# Altium PCB Sahasrara_CaSense_PCB.PcbDoc
Units mil, origin at the board's own origin, x right, y up, seen from the top; angles counter-clockwise.
Board outline 1810 x 2780 mil, 2 copper layers (Top Layer, Bottom Layer); 37 components, 47 nets, 135 pads, 169 vias.
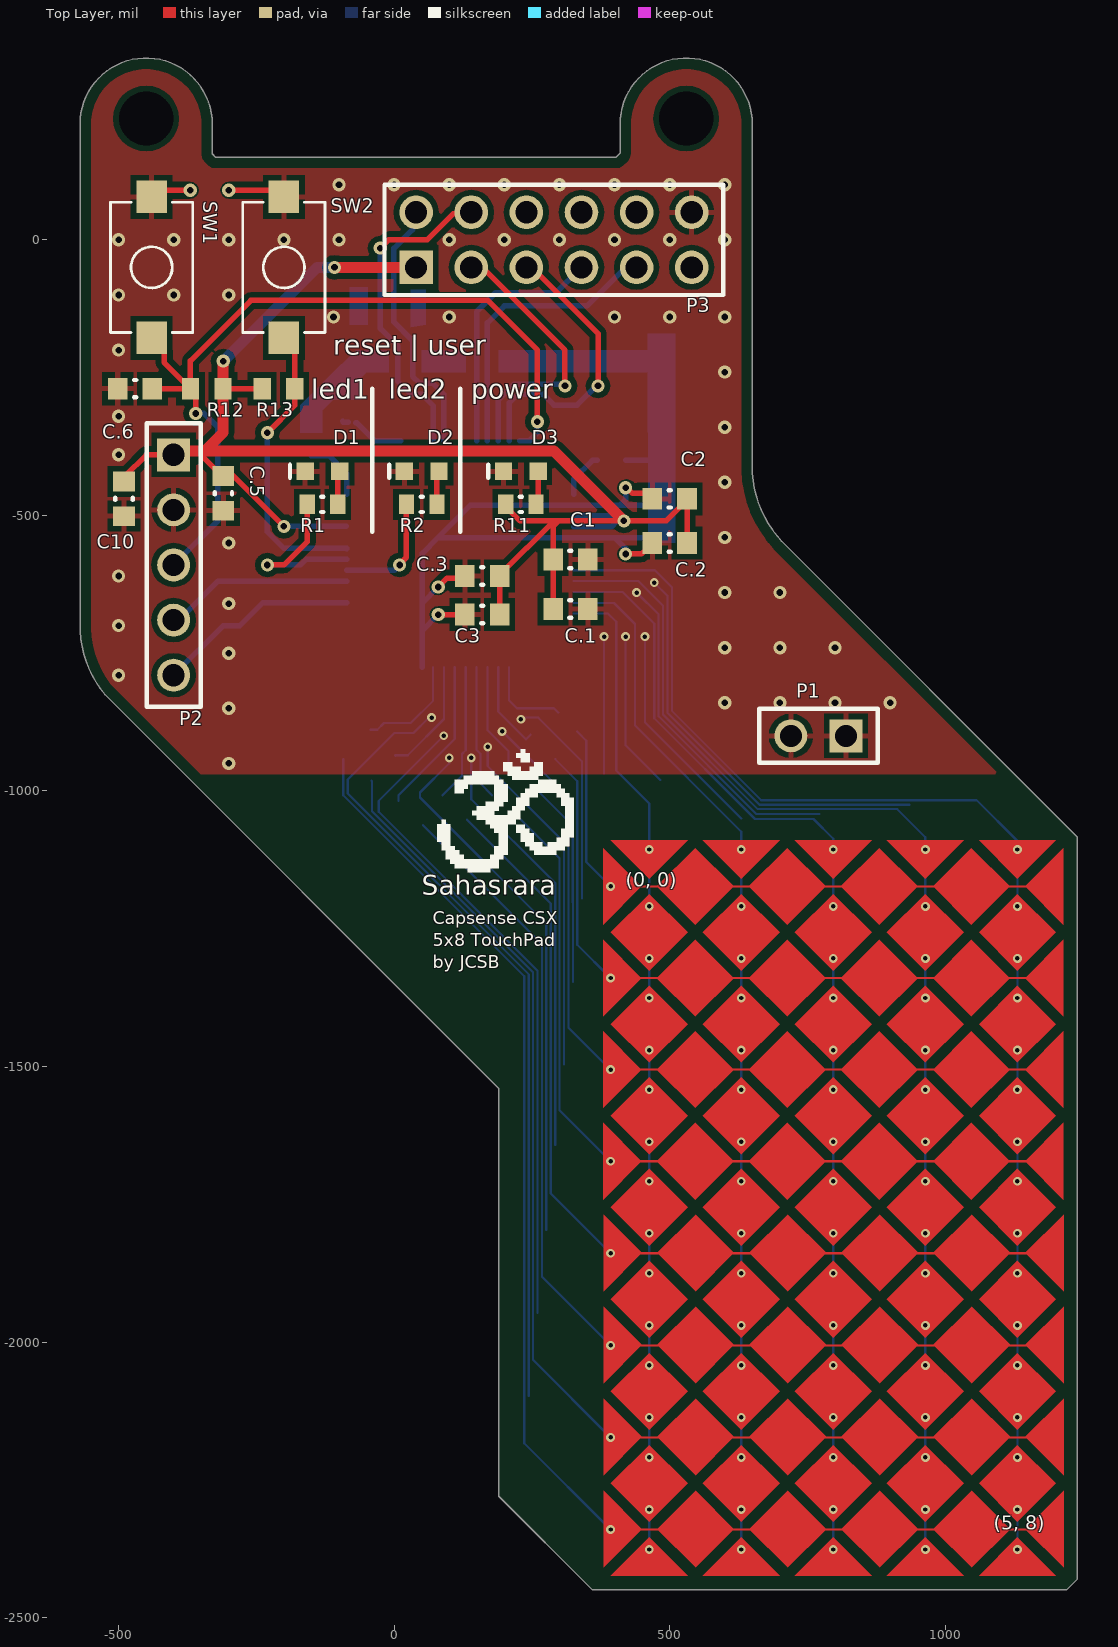
[diagram p0: Top Layer view]
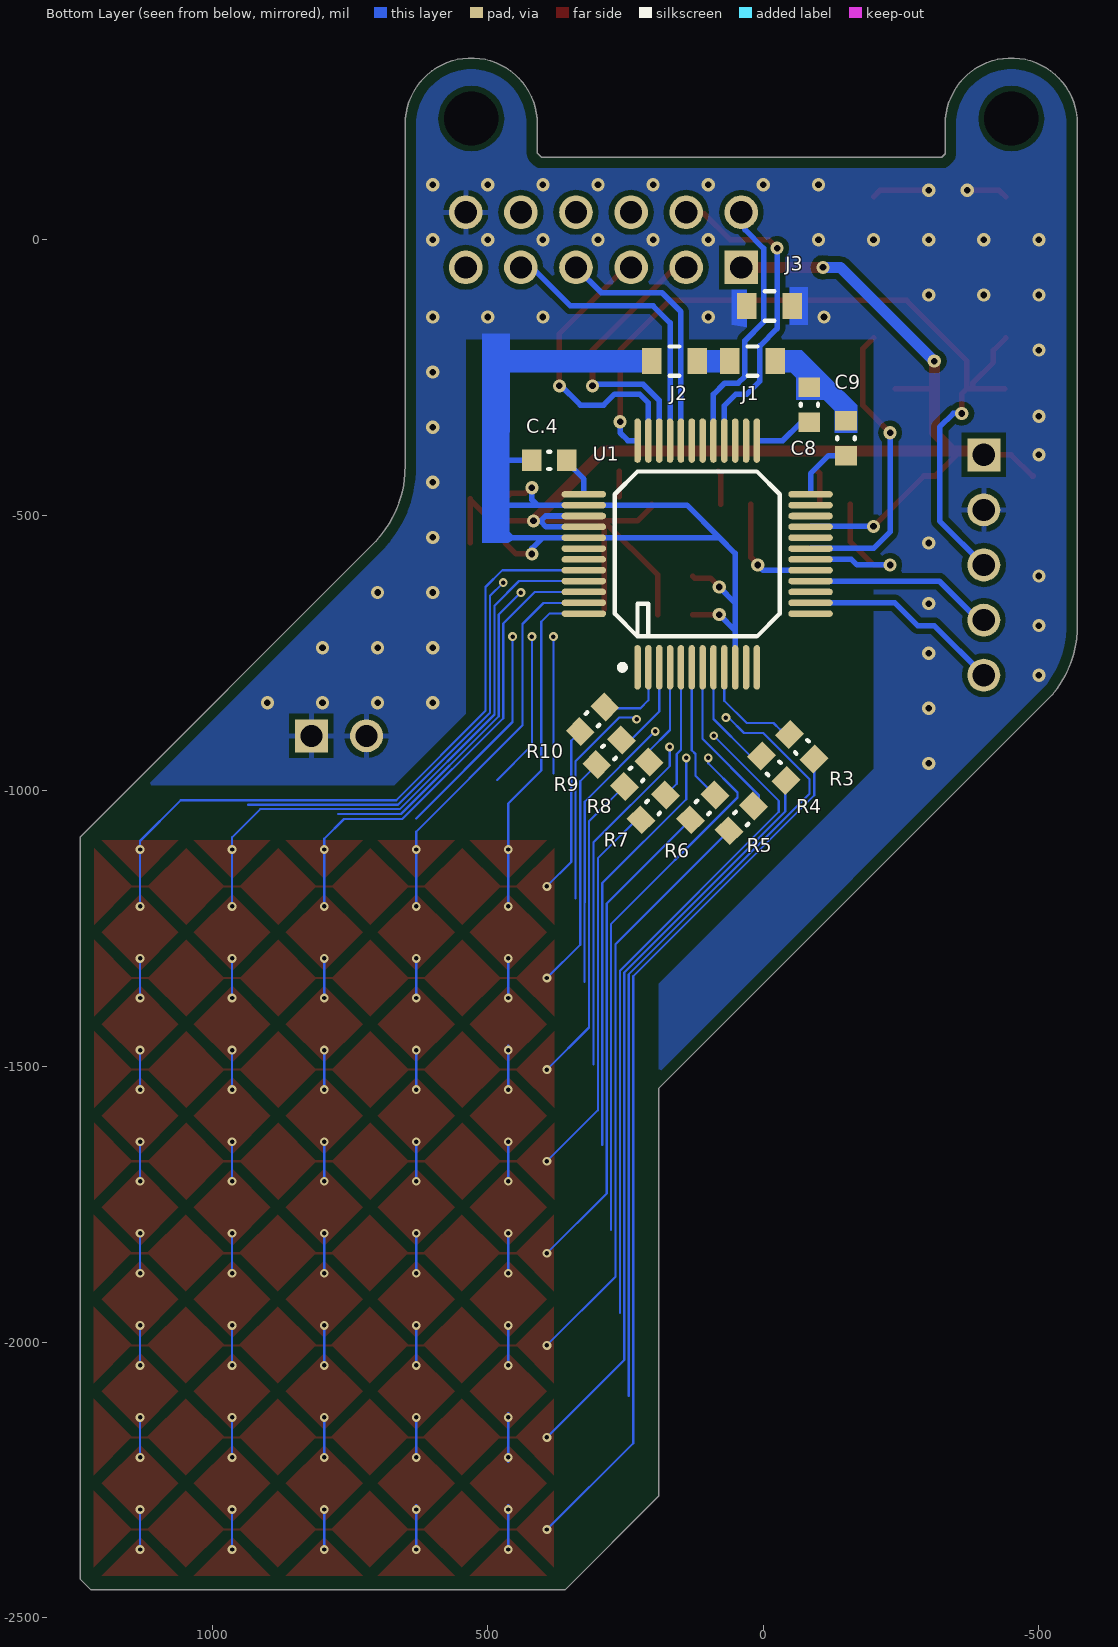
[diagram p1: Bottom Layer view, seen from below]

## Layer stack, top to bottom
Top Solder: solder mask 0.4, Solder Resist, Dk 3.5
Top Layer: signal copper 1.4
Dielectric 1: dielectric 12.6, FR-4, Dk 4.8
Bottom Layer: signal copper 1.4
Bottom Solder: solder mask 0.4, Solder Resist, Dk 3.5

## Board outline
190,-1540 -524.82,-825.18 -524.73,-825.08 cw(c-372.73,-699.32) -570,-696.61 -570,210 cw(c-450,210) -330,210 -330,156.09 -323.91,150 402.71,150 410,157.29 410,210 cw(c530,210) 650,210 650,-411.79 650,-409.09 ccw(c847.27,-411.79) 695.27,-537.56 702.78,-546.63 1240,-1083.86 1240,-2430 1220,-2450 360,-2450 190,-2280

## Design rules (kind name [scope] priority, off if disabled: settings)
BoardOutlineClearance [All] p1: gap=10 ignorepadtopadclearanceinfootprint=FALSE except(0: Arc-SplitContinuation Track-SplitContinuation SMDPad-SplitContinuation THPad-SplitContinuation Via-SplitContinuation Fill-SplitContinuation Poly-SplitContinuation Region-SplitContinuation Text-SplitContinuation; 20: Poly-OutlineEdge Poly-CavityEdge Poly-CutoutEdge Poly-SplitBarrior)
Clearance [All] p1: gap=10 ignorepadtopadclearanceinfootprint=FALSE except(0: Arc-Hole Track-Hole SMDPad-Hole Fill-Hole Poly-Hole Region-Hole Text-Hole; 4: Arc-Arc Arc-Track Track-Track; 5: Arc-SMDPad Arc-THPad Track-SMDPad Track-THPad SMDPad-SMDPad; 7: Arc-Via Track-Via SMDPad-Via THPad-Via Via-Via; 8: THPad-Hole Via-Hole)
HoleSize [All] p1: absolutevalues=TRUE maxlimit=100 minlimit=6 maxpercent=80.000 minpercent=20.000
MinimumAnnularRing [All] p1: minimumring=4
MinimumSolderMaskSliver [All] p1: minsoldermaskwidth=4.5
PolygonConnect PolygonConnect_1 [All] p1: thpad.connectstyle=Relief thpad.reliefconductorwidth=10 thpad.reliefentries=4 thpad.polygonreliefangle="90 Angle" thpad.airgapwidth=10 smdpad.connectstyle=Relief smdpad.reliefconductorwidth=10 smdpad.reliefentries=4 smdpad.polygonreliefangle="90 Angle" smdpad.airgapwidth=10 via.connectstyle=Direct via.reliefconductorwidth=10 via.reliefentries=4 via.polygonreliefangle="90 Angle" via.airgapwidth=10
RoomDefinition CY8C4125AZI-S433 [InComponentClass('CY8C4125AZI-S433')] p1: confinementstyle=ConfineOut formatcopy=TRUE lockcomponents=FALSE outline 5027.23,-1913.27 7868.27,-1913.27 7868.27,-541.5 5027.23,-541.5
RoomDefinition CSX_Capsense [InComponentClass('CSX_Capsense')] p2: confinementstyle=ConfineOut formatcopy=TRUE lockcomponents=FALSE outline 5032.28,-2198.43 6748.82,-2198.43 6748.82,-1962.2 5032.28,-1962.2
RoomDefinition Comm [InComponentClass('Comm')] p3: confinementstyle=ConfineOut formatcopy=TRUE lockcomponents=FALSE outline 5023.29,-2995.95 6098.09,-2995.95 6098.09,-2247.92 5023.29,-2247.92
RoutingVias [All] p1: holewidth=28 width=50 viastyle="Through Hole" minholewidth=6 minwidth=14 maxholewidth=28 maxwidth=50
SilkToSilkClearance [All] p1: silktosilkclearance=4
SilkToSolderMaskClearance [IsPad] p1: minsilkscreentomaskgap=7 clearancetoexposedcopper=TRUE
SolderMaskExpansion [All] p1: expansion=4 istentingtop=FALSE
Width [All] p1: maxlimit=30 minlimit=4 preferedwidth=10 minimp=50.000000 maximp=50.000000 favimp=50.000000
26 further rules are at their usual default settings.

## Classes and differential pairs
component class CY8C4125AZI-S433: C1 C2 C3 C.1 C.2 C.3 C.4 U1
component class CSX_Capsense: C8 C9 J1 J2 P1 R3 R4 R5 R6 R7 R8 R9 R10
component class Comm: C10 C.5 C.6 D1 D2 D3 J3 P2 P3 R1 R2 R11 R12 R13 SW1 SW2

## Components (designator, comment, footprint, x,y, rotation, side; value= is the part's Value field where it differs from the comment)
C1 "1uF" CAPC0603(1608)100_N 320,-580 r180 top
C2 "1uF" CAPC0603(1608)100_N 500,-470 r180 top
C3 "1uF" CAPC0603(1608)100_N 160,-680 r180 top
C8 "470pF" CAPC0603(1608)100_N -83.5,-299.25 r90 bottom
C9 "470pF" CAPC0603(1608)100_N -150,-360 r90 bottom
C10 "1uF" CAPC0603(1608)100_N -490,-470 r90 top
C.1 "0.1uF" CAPC0603(1608)100_N 320,-670 r180 top value=1uF
C.2 "0.1uF" CAPC0603(1608)100_N 500,-550 r180 top value=1uF
C.3 "0.1uF" CAPC0603(1608)100_N 160,-610 r180 top value=1uF
C.4 "0.1uF" CAPC0603(1608)100_N 388.5,-400 r0 bottom value=1uF
C.5 "0.1uF" CAPC0603(1608)100_N -310,-460 r90 top value=1uF
C.6 "0.1uF" CAPC0603(1608)100_N -470,-270 r0 top value=1uF
D1 "150060BS75000" 0603_A -130,-420 r0 top
D2 "150060BS75000" 0603_A 50,-420 r0 top
D3 "150060BS75000" 0603_A 230,-420 r0 top
J1 "0 ohm" FP-RT0805-MFG 20,-220 r0 bottom value=196Ω
J2 "0 ohm" FP-RT0805-MFG 161.34,-220 r0 bottom value=196Ω
J3 "0 ohm" FP-RT0805-MFG -11.34,-120 r0 bottom value=196Ω
P1 "MTLW-102-05-T-S-172" SMTC-MTLW-102-05-X-S-172 820,-900 r180 top
P2 "MTLW-105-05-L-S-190" SMTC-MTLW-105-05-X-S-190 -400,-390 r270 top
P3 "TSW-106-07-G-D" SMTC-TSW-106-07-X-D 40,-50 r0 top
R1 "330" RESC0603(1608)_L -130,-480 r0 top value="330.00 Ohm"
R2 "330" RESC0603(1608)_L 50,-480 r0 top value="330.00 Ohm"
R3 "2K" RESC0603(1608)_N -70,-920 r225 bottom value="2000.00 Ohm"
R4 "2K" RESC0603(1608)_N -19,-959 r225 bottom value="2000.00 Ohm"
R5 "2K" RESC0603(1608)_N 40,-1050 r315 bottom value="2000.00 Ohm"
R6 "2K" RESC0603(1608)_N 110,-1030 r315 bottom value="2000.00 Ohm"
R7 "2K" RESC0603(1608)_N 200,-1030 r315 bottom value="2000.00 Ohm"
R8 "2K" RESC0603(1608)_N 230,-970 r315 bottom value="2000.00 Ohm"
R9 "2K" RESC0603(1608)_N 280,-930 r315 bottom value="2000.00 Ohm"
R10 "2K" RESC0603(1608)_N 310,-870 r315 bottom value="2000.00 Ohm"
R11 "330" RESC0603(1608)_L 230,-480 r0 top value="330.00 Ohm"
R12 "10K" RESC1608X55X25ML10T15 -340,-270 r0 top
R13 "10K" RESC1608X55X25ML10T15 -210,-270 r180 top
SW1 "434121025816" 434121025816 -440,-50 r90 top
SW2 "434121025816" 434121025816 -200,-50 r90 top
U1 "CY8C4125AZI-S433" CY8C4125AZI-S433 120,-570 r90 bottom locked

## Footprints (in the part's own frame and the unit in brackets; to place one, negate y for a bottom-side part, rotate by r counter-clockwise, add the part's x,y. Pads: shape width x height; smd on the part's side, far side on the other; paste and mask are expansions set on the pad)
0603_A [mm] "Chip LED, 2-Leads, Body 1.6x0.8mm, IPC Medium Density"
  rect 0.8x0.8 smd: 1(-0.8,0) 2(0.8,0)
  silkscreen extent -1.5,-0.3 -1.5,0.3, body extent -0.8,-0.4 0.8,0.4, height 0.7
434121025816 [mm] "6.0*3.8mm vertical type, SMD, height 2.5mm, black actuator, 160gf, T&R"
  rect 1.5x1.4 smd: 1(-3.25,0) 2(3.25,0)
  silkscreen extent -3,-1.9 3,1.9, body extent -3.65,-1.95 3.65,1.95, height 2.5
CAPC0603(1608)100_N [mm] "Chip Capacitor, Body 1.6x0.8mm, Height 1.0mm, IPC Medium Density"
  rect 0.9x1 smd: 1(-0.8,0) 2(0.8,0)
  silkscreen extent -0.05,-0.4 0.05,0.4, body extent -0.87,-0.48 0.88,0.47, height 1
CY8C4125AZI-S433 [mm] "CQFP, 48-Leads, Body 11.70x11.70mm, Pitch 0.50mm, IPC Medium Density"
  oval 2.05x0.3 smd: 1(-5.225,2.75) 2(-5.225,2.25) 3(-5.225,1.75) 4(-5.225,1.25) 5(-5.225,0.75) 6(-5.225,0.25) 7(-5.225,-0.25) 8(-5.225,-0.75) 9(-5.225,-1.25) 10(-5.225,-1.75) 11(-5.225,-2.25) 12(-5.225,-2.75) 25(5.225,-2.75) 26(5.225,-2.25) 27(5.225,-1.75) 28(5.225,-1.25) 29(5.225,-0.75) 30(5.225,-0.25) 31(5.225,0.25) 32(5.225,0.75) 33(5.225,1.25) 34(5.225,1.75) 35(5.225,2.25) 36(5.225,2.75)
  oval 0.3x2.05 smd: 13(-2.75,-5.225) 14(-2.25,-5.225) 15(-1.75,-5.225) 16(-1.25,-5.225) 17(-0.75,-5.225) 18(-0.25,-5.225) 19(0.25,-5.225) 20(0.75,-5.225) 21(1.25,-5.225) 22(1.75,-5.225) 23(2.25,-5.225) 24(2.75,-5.225) 37(2.75,5.225) 38(2.25,5.225) 39(1.75,5.225) 40(1.25,5.225) 41(0.75,5.225) 42(0.25,5.225) 43(-0.25,5.225) 44(-0.75,5.225) 45(-1.25,5.225) 46(-1.75,5.225) 47(-2.25,5.225) 48(-2.75,5.225)
  silkscreen extent -5.35,-3.8 3.8,3.8, body extent -3.5,-3.5 3.5,3.5, height 1.4
FP-RT0805-MFG [mm]
  rect 0.9x1.2 smd paste+0 mask+0: 1(-1.05,0) 2(1.05,0)
  silkscreen extent -0.23,-0.67 0.23,0.67, body extent -1,-0.62 1,0.62, height 0.6
RESC0603(1608)_L [mm] "Chip Resistor, Body 1.6x0.8mm, IPC High Density"
  rect 0.7x0.9 smd: 1(-0.7,0) 2(0.7,0)
  silkscreen extent -0.05,-0.35 0.05,0.35, body extent -0.85,-0.47 0.85,0.47, height 0.6
RESC0603(1608)_N [mm] "Chip Resistor, Body 1.6x0.8mm, IPC Medium Density"
  rect 0.9x1 smd: 1(-0.8,0) 2(0.8,0)
  silkscreen extent -0.05,-0.4 0.05,0.4, body extent -0.85,-0.47 0.85,0.47, height 0.6
RESC1608X55X25ML10T15 [mm] "Chip Resistor, 2-Leads, Body 1.60x0.80mm, IPC Low Density"
  rect 0.8x1 smd: 1(-0.75,0) 2(0.75,0)
  body extent -0.85,-0.45 0.85,0.45, height 0.55
SMTC-MTLW-102-05-X-S-172 [mm] "Terminal Assembly, 1x2 Pins, Vertical, 2.54mm Pitch, Male"
  rect 1.52x1.52 hole 1.02: 1(0,0)
  round 1.52 hole 1.02: 2(2.54,0)
  silkscreen extent -1.46,-1.24 4,1.24, body extent -1.27,-1.24 3.81,1.24, height 5.89
SMTC-MTLW-105-05-X-S-190 [mm] "Terminal Assembly, 1x5 Pins, Vertical, 2.54mm Pitch, Male"
  rect 1.52x1.52 hole 1.02: 1(0,0)
  round 1.52 hole 1.02: 2(2.54,0) 3(5.08,0) 4(7.62,0) 5(10.16,0)
  silkscreen extent -1.46,-1.24 11.62,1.24, body extent -1.27,-1.24 11.43,1.24, height 6.35
SMTC-TSW-106-07-X-D [mm] ".025 SQ Post Terminal Strip Assembly, 2x6 Pins, Vertical, 2.54mm Pitch, Male"
  rect 1.55x1.55 hole 1.02: 1(0,0)
  round 1.55 hole 1.02: 2(0,2.54) 3(2.54,0) 4(2.54,2.54) 5(5.08,0) 6(5.08,2.54) 7(7.62,0) 8(7.62,2.54) 9(10.16,0) 10(10.16,2.54) 11(12.7,0) 12(12.7,2.54)
  silkscreen extent -1.46,-1.27 14.16,3.81, body extent -1.27,-1.27 13.97,3.81, height 8.38

## Part data
C1 C2 C3 C10: library part CMP-1035-02746-1, "CAP 1uF 50V ±20% 0603 (1608 Metric) Thickness 1mm SMD", Case-EIA=0603, Case-Metric=1608, Rated Voltage="50 V", Tolerance=Â±20%, Max Thickness="1 mm", Technology=SMT
C8 C9: library part CMP-1035-01661-1, "CAP 470pF 10V ±10% 0603 (1608 Metric) Thickness 1mm SMD", Case-EIA=0603, Case-Metric=1608, Rated Voltage="10 V", Tolerance=Â±10%, Max Thickness="1 mm", Technology=SMT
C.1 C.2 C.3 C.4 C.5 C.6: library part CMP-1035-02746-1, "CAP 0.1 uF 50V ±20% 0603 (1608 Metric) Thickness 1mm SMD", Case-EIA=0603, Case-Metric=1608, Rated Voltage="50 V", Tolerance=Â±20%, Max Thickness="1 mm", Technology=SMT
D1 D2 D3: library part CMP-1426-00003-1, "SMD mono-color Chip LED, WL-SMCW, Blue", Color=Blue, Manufacturer="Wuerth Elektronik", ComponentLink1Description="Manufacturer URL", ComponentLink1URL=http://www.we-online.com, ComponentLink2Description=Datasheet, ComponentLink2URL=http://katalog.we-online.com/led/datasheet/150060BS75000.pdf, PackageReference=0603_A, PartNumber=150060BS75000
J1 J2 J3: library part CMP-03412-032918-1, "1/8W 0805", Manufacturer=Yageo, Manufacturer Part Number=RT0805CRD07196RL, Package=RT0805, Power Rating=0.125W, Resistance=196Ω, Temperature="-55°C to +155°C", Temperature Coefficient="25 ppm/°C", Temperature Range High=+155°C, Temperature Range Low=-55°C, Tolerance=0.005, Voltage Rating=150V, Automotive=No, Category=Res, ComponentLink2Description=Datasheet, ComponentLink2URL=http://www.yageo.com/documents/recent/PYu-RT_1-to-0.01_RoHS_L_9.pdf, Composition="Thin Film", Device Class L1="Passive Components", Device Class L2=Resistors, Device Class L3="Chip SMD Resistors", Digikey Description="RES SMD 196 OHM 0.25% 1/8W 0805", Footprint Url=http://www.yageo.com/exep/pages/download/literatures/PYu-R_Mount_10.pdf, Height=0.6mm, Ipc Land Pattern Name=RESC200125X50, Lead Free=Yes, Octopart=https://octopart.com/rt0805crd07196rl-yageo-1167820, RoHS=TRUE, Series=RT
P1: library part CMP-1024-00065-1, "Low Profile .025\" SQ Post Header, Through-hole, Vertical, -55 to 105 degC, 2.54 mm Pitch, 2-Pin, Male, RoHS", Manufacturer=Samtec, Temperature Range="-55 to 105 degC", ComponentLink1Description="Manufacturer URL", ComponentLink1URL=http://www.samtec.com, ComponentLink2Description=Datasheet, ComponentLink2URL=http://www.samtec.com/documents/webfiles/pdf/MTLW_TH.PDF, ComponentLink3Description="Package Specification", ComponentLink3URL=http://www.samtec.com/documents/webfiles/cpdf/MTLW-1XX-XX-XX-X-XXX-XX-XX-MKT1.pdf, DatasheetVersion=F-214, Mounting Technology=Through-hole, Orientation=Vertical, PackageDescription="Low Profile Terminal Assembly", PackageReference=MTLW-102-05-X-S-172, PackageVersion="T, 6/1991", PartNumber=MTLW-102-05-T-S-172, Pitch="2.54 mm", RoHS=True
P2: library part CMP-1024-00079-1, "Low Profile .025\" SQ Post Header, Through-hole, Vertical, -55 to 125 degC, 2.54 mm Pitch, 5-Pin, Male, RoHS", Manufacturer=Samtec, Temperature Range="-55 to 125 degC", ComponentLink1Description="Manufacturer URL", ComponentLink1URL=http://www.samtec.com, ComponentLink2Description=Datasheet, ComponentLink2URL=http://www.samtec.com/documents/webfiles/pdf/MTLW_TH.PDF, ComponentLink3Description="Package Specification", ComponentLink3URL=http://www.samtec.com/documents/webfiles/cpdf/MTLW-1XX-XX-XX-X-XXX-XX-XX-MKT1.pdf, DatasheetVersion=F-214, Mounting Technology=Through-hole, Orientation=Vertical, PackageDescription="Low Profile Terminal Assembly", PackageReference=MTLW-105-05-X-S-190, PackageVersion="T, 6/1991", PartNumber=MTLW-105-05-L-S-190, Pitch="2.54 mm", RoHS=True
P3: library part CMP-1024-00379-1, "0.025\" SQ Post Header, Through-hole, Vertical, -55 to 125 degC, 2.54 mm Pitch, 12-Pin, Male, RoHS", Manufacturer=Samtec, Temperature Range="-55 to 125 degC", ComponentLink1Description="Manufacturer URL", ComponentLink1URL=http://www.samtec.com, ComponentLink2Description=Datasheet, ComponentLink2URL=http://www.samtec.com/documents/webfiles/pdf/TSW_TH.PDF, ComponentLink3Description="Package Specification", ComponentLink3URL=http://www.samtec.com/documents/webfiles/cpdf/TSW-XXX-XX-XXX-X-XX-XXX-MKT.pdf, DatasheetVersion=F-214, Mounting Technology=Through-hole, Orientation=Vertical, PackageDescription=".025[0.64] SQ. Post Terminal Strip Assembly", PackageReference=TSW-106-07-X-D, PackageVersion="DM, 8/1988", PartNumber=TSW-106-07-G-D, Pitch="2.54 mm", RoHS=True
R1 R2 R11: library part CMP-1012-00062-1, "330R 0.1W 5% 0603 (1608 Metric)  SMD", Case-EIA=0603, Case-Metric=1608, Power="0.1 W", Tolerance="5 %", Technology=SMT
R3 R4 R5 R6 R7 R8 R9 R10: library part CMP-1012-00081-1, "2K 0.1W 5% 0603 (1608 Metric)  SMD", Case-EIA=0603, Case-Metric=1608, Power="0.1 W", Tolerance="5 %", Technology=SMT
R12 R13: library part CMP-2000-05024-1, "Chip Resistor, 4.7 KOhm, +/- 5%, 100 mW, -55 to 155 degC, 0603 (1608 Metric), RoHS, Tape and Reel", Case Code - in=0603, Case Code - mm=1608, Manufacturer=Yageo, Operating Temperature Range=-55Cto+155C, Package Description="2-Pin Surface Mount Device, Body 1.6 x 0.8 mm", Package Reference=603, Power Rating=100mW, Resistance=4.7kOhms, Temperature Coefficient=100PPM/C, Tolerance=5%, Voltage Rating=50V, Datasheet URL=http://www.yageo.com/documents/recent/PYu-RC_Group_51_RoHS_L_04.pdf, Datasheet Version="Rev. 4, 02/2016", Manufacturer URL=http://www.yageo.com/, Packaging=Reel, Product=ThickFilmResistorsGeneralPurpose, Series=RC, Termination Style=SMD/SMT
SW1 SW2: library part CMP-1459-00004-1, "WS-TASV SMD Tact Switch 6.0X3.8 mm", Manufacturer="Wuerth Elektronik", ComponentLink1Description="Manufacturer URL", ComponentLink1URL=http://www.we-online.com, ComponentLink2Description=Datasheet, ComponentLink2URL=http://katalog.we-online.de/em/datasheet/434121025816.pdf, NoPins=02, PackageReference=434121025816, PartNumber=434121025816

## Free pads (board coordinates)
  round 60 hole 98.43: 2(-450,220) 2(530,220)

## Via types
v1: diameter 16, hole 8, Top Layer to Bottom Layer, 100 vias
v2: diameter 24, hole 12, Top Layer to Bottom Layer, 69 vias

## Nets (pads, with @x,y where several pads share a name; then routed paths per layer and width w, separated by ;. In a path a pad name is that pad's centre, name@x,y a point inside that pad or via, vN(x,y) a via of type N, cw(c..) or ccw(c..) an arc to the next point about the centre after c; other vN are vias at no path point)
+3v3: C1.2 C2.1 C3.1 C10.2 C.1.2 C.2.1 C.3.1 C.5.2 P2.1 P3.1 R11.1 R12.2 R13.2 U1.21 U1.39 U1.40 | length 2967.2
  Top Layer w10: C10.2@-490,-428.5 -488.03,-428.5 -449.53,-390 P2.1 ; -343.47,-383 -350.47,-390 -311.97,-428.5 C.5.2 -291.5,-428.5 v2(-200,-520) ; R12.2 R13.2 ; C3.1 C.3.1 191.5,-608.03 239.53,-560 240,-560 290,-510 ; R11.1 202.44,-483.94 228.5,-510 290,-510 ; C.1.2 C1.2 288.5,-520 298.5,-510 ; C.2.1 C2.1@531.5,-471.97 ; C2.1 C2.1@531.5,-471.97 ; 290,-510 298.5,-510 ; 298.5,-510 v2(417,-510) 493.46,-510 C2.1@531.5,-471.97
  Top Layer w20: P2.1 -393,-383 -343.47,-383 ; v2(-310,-220) -310.47,-220.47 R12.2 -310.47,-350 -343.47,-383 ; v2(-108.16,-50) P3.1 ; v2(417,-510) 290,-383 -343.47,-383
  Bottom Layer w10: v2(-200,-520) U1.21@-86.5,-520 ; U1.40 394.21,-520.79 404.5,-510.5 ; U1.39 395.1,-501.1 404,-510 v2(417,-510)
  Bottom Layer w20: v2(-310,-220) -140,-50 v2(-108.16,-50)
CintA: C9.1 U1.24 | length 115.3
  Bottom Layer w10: C9.1 -118.5,-391.5 -85.71,-424.29 U1.24
CintB: C8.1 U1.25 | length 105.9
  Bottom Layer w10: C8.1@-93.5,-329.25 -92.01,-330.75 C8.1 ; C8.1@-70,-331.5 -68.03,-331.5 -35.24,-364.29 U1.25
CTS: P3.11
GND: C1.1 C2.2 C3.2 C10.1 C.1.1 C.2.2 C.3.2 C.4.2 C.5.1 C.6.1 D1.1 D2.1 D3.1 J2.2 J3.1 J3.2 P1.1 P1.2 P2.2 P3.12 SW1.2 SW2.2 U1.10 U1.38 U1.41 | length 9906.5
  Top Layer w10: SW1.2 -427.95,90 v2(-370,90) ; v2(-300,90) -212.05,90 SW2.2 ; v2(80,-680) C3.2 ; v2(80,-630) 96.26,-613.74 124.77,-613.74 C.3.2 ; v2(420,-570) 448.5,-570 C.2.2 ; v2(420,-450) 422.86,-450 432.86,-460 458.5,-460 C2.2 ; P3.12 P3.12@548.85,41.15
  Bottom Layer w4: v1(68,-867) 63,-867 35,-895 0.19,-895 -84,-979.19 -84,-1004.63 244.24,-1332.86 244.24,-2097.46 ; v1(90,-900) -28,-1018 -28,-1038 260.24,-1326.24 260.24,-1947.2 ; v1(100,-940) 100,-950 47,-1003 47,-1012 276.24,-1241.24 276.24,-1796.94 ; v1(140,-940) 140,-1015 292.24,-1167.24 292.24,-1642.24 ; v1(170,-920) 170,-955 308.24,-1093.24 308.24,-1496.43 ; v1(196,-892) 196.81,-892 324.24,-1019.43 324.24,-1202.53 324.36,-1202.66 324.36,-1346.29 ; v1(230,-870) 233,-867 261.81,-867 340.72,-945.91 340.72,-1195.15 ; 381,-968 v1@381,-722.63 ; v1(420,-720) 420,-917 483,-980 ; v1(440,-640) 480,-680 480,-864.64 657.36,-1042 772,-1042 ; v1(455,-720) 455,-875 630,-1050 ; v1(472,-622) 496,-646 496,-858.02 662.98,-1025 935,-1025
  Bottom Layer w10: U1.10 51.1,-708.9 ; v2(80,-680) 51.1,-708.9 ; v2(80,-630) 51.1,-658.9 ; v2(420,-570) 420,-560 400.24,-540.24 ; v2(420,-450) 420,-471.42 410,-481.42 ; C.4.2 470,-400 ; 470,-540 469.76,-540.24 400.24,-540.24 ; 470,-481.42 410,-481.42 ; 51.1,-708.9 51.1,-658.9 ; 51.1,-658.9 51.1,-568.9 80,-540 ; 80,-540 138.58,-481.42 U1.38 410,-481.42 ; 80,-540 80.47,-540.47 U1.41 325.94,-540.24 400.24,-540.24
  other v1: 381,-720
  other v2: -300,-950 -300,-850 600,-840 700,-840 800,-840 900,-840 -500,-790 -300,-750 600,-740 700,-740 800,-740 -500,-700 -300,-660 600,-640 700,-640 -500,-610 -300,-550 600,-540 600,-440 -500,-390 600,-340 -500,-320 600,-240 -500,-200 -110,-140 100,-140 400,-140 500,-140 600,-140 -500,-100 -400,-100 -300,-100 -500,0 -400,0 -300,0 -200,0 -100,0 100,0 200,0 300,0 400,0 500,0 600,0 -100,100 0,100 100,100 200,100 300,100 400,100 500,100 600,100
LED1: R2.1 U1.17 | length 214.8
  Top Layer w10: v2(10,-590) 10,-588.38 22.44,-575.94 R2.1
  Bottom Layer w10: U1.17 0.47,-599.53 v2(10,-590)
LED2: R1.1 U1.18 | length 306.1
  Top Layer w10: v2(-230,-590) -200,-590 -157.56,-547.56 R1.1
  Bottom Layer w10: v2(-230,-590) -170,-590 -159.84,-579.84 U1.18
MISO: P3.9 U1.33 | length 526
  Bottom Layer w10: U1.33 169.21,-150.79 200,-120 350,-120 417.2,-52.8 437.2,-52.8 P3.9
MOSI: P3.7 U1.32 | length 457.6
  Bottom Layer w10: U1.32 149.53,-130.47 184,-96 294,-96 P3.7
NetC8_2: C8.2 C9.2 J1.1
NetC.4_1: C.4.1 U1.37 | length 84.4
  Bottom Layer w10: U1.37 325.71,-434.29 360,-400 C.4.1@368.5,-400
NetD1_2: D1.2 R1.2 | length 61.6
  Top Layer w10: R1.2 -102.44,-423.94 D1.2
NetD2_2: D2.2 R2.2 | length 61.6
  Top Layer w10: R2.2 77.56,-423.94 D2.2
NetD3_2: D3.2 R11.2 | length 46.1
  Top Layer w10: R11.2@261.5,-466.06 D3.2
NetJ1_2: J1.2 J2.1
RESET: C.6.2 P2.3 R12.1 SW1.1 U1.36 | length 1518.6
  Top Layer w10: SW1.1 -417.44,-200.51 -417.44,-222.56 -380,-260 R12.1@-380,-270 ; C.6.2 R12.1@-380,-270 ; v2(-360,-315) -360,-279.53 R12.1 ; v2(260,-330) 260,-200 170,-110 -260,-110 -369.53,-219.53 R12.1 ; R12.1@-380,-270 R12.1
  Bottom Layer w10: P2.3 -320,-510 -320,-340 -345,-315 v2(-360,-315) ; U1.36 245.71,-364.29 260,-350 v2(260,-330)
RTS: P3.10
RX: P3.8
RX0: R10.1 U1.2 | length 158.2
  Bottom Layer w4: U1.2 208.58,-835.58 223,-850 290,-850 R10.1@297.73,-857.73
RX0_PAD: R10.2 | length 1076
  Top Layer w4: v1(392.83,-1173.22) 1162.83,-1173.22
  Bottom Layer w4: R10.2 348.72,-908.72 348.72,-1129.1 v1(392.83,-1173.22)
RX1: R9.1 U1.3 | length 163.4
  Bottom Layer w4: U1.3 188.9,-855.9 239.23,-906.23 R9.1@247.73,-897.73
RX1_PAD: R9.2 | length 1208.9
  Top Layer w4: v1(392.83,-1339.48) 1162.83,-1339.48
  Bottom Layer w4: R9.2@292.27,-942.27 332.24,-982.24 332.24,-1199.22 332.36,-1199.35 332.36,-1279 v1(392.83,-1339.48)
RX2: R8.1 U1.4 | length 188
  Bottom Layer w4: U1.4 169.21,-889.25 207.73,-927.77 R8.1
RX2_PAD: R8.2 | length 1336
  Top Layer w4: v1(392.83,-1505.74) 1162.83,-1505.74
  Bottom Layer w4: R8.2@257,-996 316.24,-1055.24 316.24,-1429.14 v1(392.83,-1505.74)
RX3: R7.1 U1.5 | length 243.7
  Bottom Layer w4: U1.5 149.53,-925.49 157,-932.96 157,-987 R7.1
RX3_PAD: R7.2 | length 1474.4
  Top Layer w4: v1(392.83,-1672) 1162.83,-1672
  Bottom Layer w4: R7.2@218,-1040 300.24,-1122.24 300.24,-1579.4 v1(392.83,-1672)
RX4: R6.1 U1.6 | length 249.5
  Bottom Layer w4: R6.1 123,-972.46 123,-932.96 129.84,-926.12 U1.6
RX4_PAD: R6.2 | length 1664.7
  Top Layer w4: v1(392.83,-1839.04) 1162.83,-1839.04
  Bottom Layer w4: R6.2 284.24,-1204.24 284.24,-1730.44 v1(392.83,-1839.04)
RX5: R5.1 U1.7 | length 284.4
  Bottom Layer w4: R5.1@7.73,-1017.73 7.73,-1008.23 110.16,-905.8 U1.7
RX5_PAD: R5.2 | length 1854.9
  Top Layer w4: v1(392.83,-2006.09) 1162.83,-2006.09
  Bottom Layer w4: R5.2@52.27,-1062.27 268.24,-1278.24 268.24,-1881.49 v1(392.83,-2006.09)
RX6: R4.1 U1.8 | length 211.6
  Bottom Layer w4: R4.1 1.88,-935.34 24.66,-935.34 90.47,-869.53 U1.8
RX6_PAD: R4.2 | length 2141.7
  Top Layer w4: v1(392.83,-2173.14) 1162.83,-2173.14
  Bottom Layer w4: R4.2 -39.88,-982.66 -39.88,-1037.43 252.24,-1329.55 252.24,-2032.54 v1(392.83,-2173.14)
RX7: R3.1 U1.9 | length 196.2
  Bottom Layer w4: R3.1@-43,-889 -30.57,-889 -18.28,-876.72 30.28,-876.72 70.79,-836.21 U1.9
RX7_PAD: R3.2 | length 2368.8
  Top Layer w4: v1(392.83,-2340.18) 1162.83,-2340.18
  Bottom Layer w4: R3.2 -92.27,-1007.67 236.24,-1336.18 236.24,-2183.58 v1(392.83,-2340.18)
SCL: P3.4 U1.28 | length 592.6
  Top Layer w10: v2(-25,-15) -10,0 60,0 107.2,47.2 137.2,47.2 P3.4
  Bottom Layer w10: v2(-25,-15) v2(-25,-15) -24.96,-147.76 -25,-147.8 -25,-160.86 6.38,-192.24 6.38,-256.38 30,-280 50,-280 70.79,-300.79 U1.28
SCLK: P3.3 U1.34 | length 500.5
  Top Layer w10: P3.3 160,-50 310,-200 v2@310,-262
  Bottom Layer w10: U1.34 188.9,-291.1 218,-262 v2@310,-262
  other v2: 310,-265
SCLK_SWD: P2.4 U1.16 | length 343.6
  Bottom Layer w10: P2.4 -390,-690 -319.21,-619.21 U1.16
SDA: P3.2 U1.29 | length 482.9
  Bottom Layer w10: P3.2 33.62,43.62 33.62,18.79 -0.51,-15.35 -0.51,-148.94 33.62,-183.08 33.62,-247.76 45.86,-260 70,-260 90.47,-280.47 U1.29
SDAT: P2.5 U1.14 | length 378.7
  Bottom Layer w10: P2.5@-390,-790 P2.5 -310,-700 -280,-700 -238.58,-658.58 U1.14
SSEL: P3.5 U1.35 | length 526.6
  Top Layer w10: P3.5 250,-50 370,-170 v2@370,-256.44
  Bottom Layer w10: U1.35 208.58,-295.86 224.44,-280 270,-280 290,-300 332,-300 v2@370,-262
  other v2: 370,-265
TX: P3.6
TX0: U1.48 | length 1161.7
  Bottom Layer w4: U1.48 388.27,-678.27 403,-693 403,-963 462.84,-1022.84 v1(462.84,-1106.34) v1(462.83,-1209.49) ; v1(462.83,-2376.46) v1(462.84,-2303.9) v1@462.84,-2296.03 ; v1@462.84,-2217.28 v1(462.83,-2209.41) v1(462.84,-2136.85) v1@462.84,-2128.98 ; v1(462.83,-2042.36) v1(462.84,-1969.8) ; v1(462.83,-1875.31) v1(462.84,-1802.76) ; v1(462.83,-1708.27) v1(462.84,-1636.5) ; v1(462.83,-1542.01) v1(462.84,-1470.24) v1@462.84,-1462.37 ; v1(462.83,-1375.75) v1(462.84,-1303.98)
TX1: U1.47 | length 1304.8
  Bottom Layer w4: U1.47 326.13,-659 399,-659 437,-697 437,-881.04 629.89,-1073.93 v1(629.89,-1106.34) v1(629.88,-1209.49) ; v1(629.88,-2376.46) v1@629.89,-2296.03 ; v1(629.88,-2209.41) v1(629.89,-2136.85) ; v1(629.88,-2042.36) v1(629.89,-1969.8) ; v1(629.88,-1875.31) v1(629.89,-1802.76) ; v1(629.88,-1708.27) v1(629.89,-1636.5) ; v1(629.88,-1542.01) v1(629.89,-1470.24) ; v1(629.88,-1375.75) v1(629.89,-1303.98) v1(629.88,-1375.75)
  other v1: 629.89,-2303.9
TX2: U1.46 | length 1388
  Bottom Layer w4: U1.46 414.86,-638.9 472,-696.04 472,-867.96 655.04,-1051 761,-1051 796.94,-1086.94 v1(796.94,-1106.34) v1(796.93,-1209.49) ; v1(796.93,-2376.46) v1(796.94,-2303.9) ; v1(796.93,-2209.41) v1(796.94,-2136.85) ; v1(796.93,-2042.36) v1(796.94,-1969.8) ; v1(796.93,-1875.31) v1(796.94,-1802.76) ; v1(796.93,-1708.27) v1@796.93,-1635.71 ; v1(796.93,-1542.01) v1@796.93,-1469.45 ; v1(796.93,-1375.75) v1@796.93,-1303.19
  other v1: 796.94,-1636.5 796.94,-1470.24 796.94,-1303.98
TX3: U1.45 | length 1579.8
  Bottom Layer w4: U1.45 443.25,-619.21 488,-663.96 488,-861.33 659.67,-1033 913,-1033 963.99,-1083.99 v1(963.99,-1106.34) v1(963.98,-1209.49) ; v1(963.98,-2376.46) v1(963.99,-2303.9) ; v1(963.98,-2209.41) v1(963.99,-2136.85) ; v1(963.98,-2042.36) v1(963.99,-1969.8) ; v1(963.98,-1875.31) v1(963.99,-1802.76) ; v1(963.98,-1708.27) v1@963.98,-1635.7 ; v1(963.98,-1542.01) v1@963.98,-1469.44 ; v1(963.98,-1375.75) v1@963.98,-1303.18
  other v1: 963.99,-1636.5 963.99,-1470.24 963.99,-1303.98
TX4: U1.44 | length 1761.6
  Bottom Layer w4: U1.44 473.57,-599.53 504,-629.96 504,-854.7 666.3,-1017 1057,-1017 1131.03,-1091.03 v1@1131.03,-1101.03 ; v1(1131.02,-2376.46) v1(1131.03,-2303.9) ; v1(1131.02,-2209.41) v1(1131.03,-2136.85) ; v1(1131.02,-2042.36) v1(1131.03,-1969.8) ; v1(1131.02,-1875.31) v1(1131.03,-1802.76) ; v1(1131.02,-1708.27) v1@1131.03,-1635.7 ; v1(1131.02,-1542.01) v1@1131.03,-1469.44 ; v1(1131.02,-1375.75) v1@1131.03,-1303.18 ; v1(1131.02,-1209.49) v1(1131.03,-1106.34)
  other v1: 1131.03,-1636.5 1131.03,-1470.24 1131.03,-1303.98
USER_SWITCH: R13.1 SW2.1 U1.19 | length 537.4
  Top Layer w10: v2(-230,-350) -180.47,-300.47 R13.1 -180.47,-197.48 SW2.1
  Bottom Layer w10: v2(-230,-350) -230,-530 -200,-560 -85.87,-560 U1.19
pads on no net: U1.1 U1.11 U1.12 U1.13 U1.15 U1.20 U1.22 U1.23 U1.26 U1.27 U1.30 U1.31 U1.42 U1.43

## Polygon pours and split planes (outlines as drawn)
GND on Bottom Layer "Bottom Layer-GND" (solid, pour order 6): 1240,-2450 360,-2450 190,-2280 190,-1540 -570,-780 -570,363 758,363 758,-608 1240,-1090
no net on Bottom Layer "Bottom Layer-No Net" (solid, pour order 12): 780,-2290
GND on Top Layer "Top Layer-GND" (solid, pour order 8): -390,-970 -580,-780 -580,433 993,433 993,-823 1140,-970

## Other copper
Top Layer:
  region net TX4: 1061.43,-2089.61 1131.02,-2020.01 1200.62,-2089.61 1131.02,-2159.2
  region net TX3: 894.38,-1256.73 963.98,-1187.14 1033.57,-1256.73 963.98,-1326.33
  region net RX0_PAD: 476.75,-1173.22 546.35,-1103.62 615.95,-1173.22 546.35,-1242.81
  region net RX0_PAD: 379.3,-1242.81 379.3,-1103.62 448.9,-1173.22
  region net TX4: 1061.43,-1256.73 1131.02,-1187.14 1200.62,-1256.73 1131.02,-1326.33
  region net TX2: 727.33,-1256.73 796.93,-1187.14 866.53,-1256.73 796.93,-1326.33
  region net TX1: 560.28,-1256.73 629.88,-1187.14 699.48,-1256.73 629.88,-1326.33
  region net RX0_PAD: 880.45,-1242.81 810.85,-1173.22 880.45,-1103.62 950.04,-1173.22
  region net RX0_PAD: 1047.49,-1242.81 977.9,-1173.22 1047.49,-1103.62 1117.09,-1173.22
  region net RX0_PAD: 1214.54,-1242.81 1144.94,-1173.22 1214.54,-1103.62
  region net RX0_PAD: 643.79,-1173.22 713.38,-1103.62 782.98,-1173.22 713.38,-1242.81
  region net TX0: 393.24,-1256.73 462.83,-1187.14 532.43,-1256.73 462.83,-1326.33
  region net TX3: 894.38,-1422.99 963.98,-1353.39 1033.57,-1422.99 963.98,-1492.59
  region net RX1_PAD: 476.75,-1339.48 546.35,-1269.88 615.95,-1339.48 546.35,-1409.07
  region net RX1_PAD: 379.3,-1409.07 379.3,-1269.88 448.9,-1339.48
  region net TX4: 1061.43,-1422.99 1131.02,-1353.39 1200.62,-1422.99 1131.02,-1492.59
  region net TX2: 727.33,-1422.99 796.93,-1353.39 866.53,-1422.99 796.93,-1492.59
  region net TX1: 560.28,-1422.99 629.88,-1353.39 699.48,-1422.99 629.88,-1492.59
  region net RX1_PAD: 880.45,-1409.07 810.85,-1339.48 880.45,-1269.88 950.04,-1339.48
  region net RX1_PAD: 1047.49,-1409.07 977.9,-1339.48 1047.49,-1269.88 1117.09,-1339.48
  region net RX1_PAD: 1214.54,-1409.07 1144.94,-1339.48 1214.54,-1269.88
  region net RX1_PAD: 643.79,-1339.48 713.38,-1269.88 782.98,-1339.48 713.38,-1409.07
  region net TX0: 393.24,-1422.99 462.83,-1353.39 532.43,-1422.99 462.83,-1492.59
  region net TX3: 894.38,-1589.25 963.98,-1519.65 1033.57,-1589.25 963.98,-1658.85
  region net RX2_PAD: 476.75,-1505.74 546.35,-1436.14 615.95,-1505.74 546.35,-1575.33
  region net RX2_PAD: 379.3,-1575.33 379.3,-1436.14 448.9,-1505.74
  region net TX4: 1061.43,-1589.25 1131.02,-1519.65 1200.62,-1589.25 1131.02,-1658.85
  region net TX2: 727.33,-1589.25 796.93,-1519.65 866.53,-1589.25 796.93,-1658.85
  region net TX1: 560.28,-1589.25 629.88,-1519.65 699.48,-1589.25 629.88,-1658.85
  region net RX2_PAD: 880.45,-1575.33 810.85,-1505.74 880.45,-1436.14 950.04,-1505.74
  region net RX2_PAD: 1047.49,-1575.33 977.9,-1505.74 1047.49,-1436.14 1117.09,-1505.74
  region net RX2_PAD: 1214.54,-1575.33 1144.94,-1505.74 1214.54,-1436.14
  region net RX2_PAD: 643.79,-1505.74 713.38,-1436.14 782.98,-1505.74 713.38,-1575.33
  region net TX0: 393.24,-1589.25 462.83,-1519.65 532.43,-1589.25 462.83,-1658.85
  region net TX3: 894.38,-1755.51 963.98,-1685.91 1033.57,-1755.51 963.98,-1825.11
  region net RX3_PAD: 476.75,-1672 546.35,-1602.4 615.95,-1672 546.35,-1741.59
  region net RX3_PAD: 379.3,-1741.59 379.3,-1602.4 448.9,-1672
  region net TX4: 1061.43,-1755.51 1131.02,-1685.91 1200.62,-1755.51 1131.02,-1825.11
  region net TX2: 727.33,-1755.51 796.93,-1685.91 866.53,-1755.51 796.93,-1825.11
  region net TX1: 560.28,-1755.51 629.88,-1685.91 699.48,-1755.51 629.88,-1825.11
  region net RX3_PAD: 880.45,-1741.59 810.85,-1672 880.45,-1602.4 950.04,-1672
  region net RX3_PAD: 1047.49,-1741.59 977.9,-1672 1047.49,-1602.4 1117.09,-1672
  region net RX3_PAD: 1214.54,-1741.59 1144.94,-1672 1214.54,-1602.4
  region net RX3_PAD: 643.79,-1672 713.38,-1602.4 782.98,-1672 713.38,-1741.59
  region net TX0: 393.24,-1755.51 462.83,-1685.91 532.43,-1755.51 462.83,-1825.11
  region net TX0: 393.24,-1755.51 462.83,-1685.91 532.43,-1755.51 462.83,-1825.11
  region net TX0: 393.24,-1922.56 462.83,-1852.96 532.43,-1922.56 462.83,-1992.16
  region net TX0: 393.24,-2089.61 462.83,-2020.01 532.43,-2089.61 462.83,-2159.2
  region net TX0: 393.24,-2256.65 462.83,-2187.06 532.43,-2256.65 462.83,-2326.25
  region net TX0: 393.24,-2423.7 462.83,-2354.1 532.43,-2423.7
  region net TX0: 393.24,-1089.69 532.43,-1089.69 462.83,-1159.28
  region net RX4_PAD: 585.33,-1836.24
  region net RX3_PAD: 643.79,-1672 713.38,-1602.4 782.98,-1672 713.38,-1741.59
  region net RX3_PAD: 1214.54,-1741.59 1144.94,-1672 1214.54,-1602.4
  region net RX3_PAD: 1047.49,-1741.59 977.9,-1672 1047.49,-1602.4 1117.09,-1672
  region net RX3_PAD: 880.45,-1741.59 810.85,-1672 880.45,-1602.4 950.04,-1672
  region net TX1: 560.28,-1089.69 699.48,-1089.69 629.88,-1159.28
  region net TX1: 560.28,-2423.7 629.88,-2354.1 699.48,-2423.7
  region net TX1: 560.28,-2256.65 629.88,-2187.06 699.48,-2256.65 629.88,-2326.25
  region net TX1: 560.28,-2089.61 629.88,-2020.01 699.48,-2089.61 629.88,-2159.2
  region net TX1: 560.28,-1922.56 629.88,-1852.96 699.48,-1922.56 629.88,-1992.16
  region net TX1: 560.28,-1755.51 629.88,-1685.91 699.48,-1755.51 629.88,-1825.11
  region net TX2: 727.33,-1089.69 866.53,-1089.69 796.93,-1159.28
  region net TX2: 727.33,-2423.7 796.93,-2354.1 866.53,-2423.7
  region net TX2: 727.33,-2256.65 796.93,-2187.06 866.53,-2256.65 796.93,-2326.25
  region net TX2: 727.33,-2089.61 796.93,-2020.01 866.53,-2089.61 796.93,-2159.2
  region net TX2: 727.33,-1922.56 796.93,-1852.96 866.53,-1922.56 796.93,-1992.16
  region net TX2: 727.33,-1755.51 796.93,-1685.91 866.53,-1755.51 796.93,-1825.11
  region net TX3: 894.38,-1089.69 1033.57,-1089.69 963.98,-1159.28
  region net TX3: 894.38,-2423.7 963.98,-2354.1 1033.57,-2423.7
  region net TX3: 894.38,-2256.65 963.98,-2187.06 1033.57,-2256.65 963.98,-2326.25
  region net TX3: 894.38,-2089.61 963.98,-2020.01 1033.57,-2089.61 963.98,-2159.2
  region net TX3: 894.38,-1922.56 963.98,-1852.96 1033.57,-1922.56 963.98,-1992.16
  region net TX4: 1061.43,-1089.69 1200.62,-1089.69 1131.02,-1159.28
  region net TX4: 1061.43,-2423.7 1131.02,-2354.1 1200.62,-2423.7
  region net TX4: 1061.43,-2256.65 1131.02,-2187.06 1200.62,-2256.65 1131.02,-2326.25
  region net TX4: 1061.43,-1922.56 1131.02,-1852.96 1200.62,-1922.56 1131.02,-1992.16
  region net TX4: 1061.43,-1755.51 1131.02,-1685.91 1200.62,-1755.51 1131.02,-1825.11
  region net RX4_PAD: 881.22,-1907.86 811.62,-1838.27 881.22,-1768.67 950.82,-1838.27
  region net RX4_PAD: 1048.27,-1907.86 978.67,-1838.27 1048.27,-1768.67 1117.86,-1838.27
  region net RX4_PAD: 1215.31,-1907.86 1145.72,-1838.27 1215.31,-1768.67
  region net RX4_PAD: 380.08,-1907.86 380.08,-1768.67 449.68,-1838.27
  region net RX4_PAD: 477.53,-1838.27 547.13,-1768.67 616.72,-1838.27 547.13,-1907.86
  region net RX4_PAD: 644.56,-1838.27 714.16,-1768.67 783.76,-1838.27 714.16,-1907.86
  region net RX5_PAD: 881.22,-2074.91 811.62,-2005.32 881.22,-1935.72 950.82,-2005.32
  region net RX5_PAD: 1048.27,-2074.91 978.67,-2005.32 1048.27,-1935.72 1117.86,-2005.32
  region net RX5_PAD: 1215.31,-2074.91 1145.72,-2005.32 1215.31,-1935.72
  region net RX5_PAD: 380.08,-2074.91 380.08,-1935.72 449.68,-2005.32
  region net RX5_PAD: 477.53,-2005.32 547.13,-1935.72 616.72,-2005.32 547.13,-2074.91
  region net RX5_PAD: 644.56,-2005.32 714.16,-1935.72 783.76,-2005.32 714.16,-2074.91
  region net RX6_PAD: 881.22,-2241.96 811.62,-2172.36 881.22,-2102.77 950.82,-2172.36
  region net RX6_PAD: 1048.27,-2241.96 978.67,-2172.36 1048.27,-2102.77 1117.86,-2172.36
  region net RX6_PAD: 1215.31,-2241.96 1145.72,-2172.36 1215.31,-2102.77
  region net RX6_PAD: 380.08,-2241.96 380.08,-2102.77 449.68,-2172.36
  region net RX6_PAD: 477.53,-2172.36 547.13,-2102.77 616.72,-2172.36 547.13,-2241.96
  region net RX6_PAD: 644.56,-2172.36 714.16,-2102.77 783.76,-2172.36 714.16,-2241.96
  region net RX7_PAD: 881.22,-2409.01 811.62,-2339.41 881.22,-2269.81 950.82,-2339.41
  region net RX7_PAD: 1048.27,-2409.01 978.67,-2339.41 1048.27,-2269.81 1117.86,-2339.41
  region net RX7_PAD: 1215.31,-2409.01 1145.72,-2339.41 1215.31,-2269.81
  region net RX7_PAD: 380.08,-2409.01 380.08,-2269.81 449.68,-2339.41
  region net RX7_PAD: 477.53,-2339.41 547.13,-2269.81 616.72,-2339.41 547.13,-2409.01
  region net RX7_PAD: 644.56,-2339.41 714.16,-2269.81 783.76,-2339.41 714.16,-2409.01
  region net RX3_PAD: 379.3,-1741.59 379.3,-1602.4 448.9,-1672
  region net RX3_PAD: 476.75,-1672 546.35,-1602.4 615.95,-1672 546.35,-1741.59
  region net TX3: 894.38,-1755.51 963.98,-1685.91 1033.57,-1755.51 963.98,-1825.11
Bottom Layer:
  region net GND: 30,-158.24 57.72,-153.62 57.72,-90.51 30,-90.51
  region net GND: -47.68,-153.62 -80.39,-153.62 -80.39,-86.38 -47.68,-86.38
  region net NetJ1_2: 50,-240 130,-240 130,-200 50,-200
  region net GND: 454,-544 454,-537 461,-530 460,-170 510,-170 510,-550 463,-550
  region net GND: 190,-240 480,-240 480,-200 190,-200
  region net NetC8_2: -60,-250 -50,-240 -10,-240 -10,-200 -70,-200 -120,-250 -170,-300 -170,-350 -130,-350 -130,-310 -110,-290 -60,-290
  pour cut-out: 1240,-2450 360,-2450 190,-2280 190,-1350 -200,-960 -200,-180 540,-180 540,-860 670,-990 1140,-990 1150,-1000 1240,-1090

## Silkscreen, mask and mechanical layers (free items; w line width, h text height)
Top Overlay:
  drawing of 4 lines, arcs and shapes, not listed
  text "reset | user" at -110,-220 h60
  text "led1" at -150,-300 h60
  text "led2" at -10,-300 h60
  text "power" at 140,-300 h60
  text "(0, 0)" at 420,-1183 h43.31
  text "Sahasrara" at 50,-1200 h60
  text "Capsense CSX  / 5x8 TouchPad / by JCSB" at 70,-1330 h40
  text "(5, 8)" at 1088,-2350 h43.31
Mechanical 1:
  lines w7.99: -570,210 cw(c-450,210) -330,210 ; 410,210 cw(c530,210) 650,210
  lines w8: -570,210 -570,-696.61 ccw(c-372.73,-699.32) -524.73,-825.08 ; -524.82,-825.18 190,-1540 190,-2280 360,-2450 1220,-2450 1240,-2430 1240,-1083.86 702.78,-546.63 695.27,-537.56 cw(c847.27,-411.79) 650,-409.09 ; -330,210 -330,156.09 -323.91,150 402.71,150 410,157.29 410,210 ; 650,-411.79 650,210